# EAGLE board untitled (EAGLE 9.5.0)
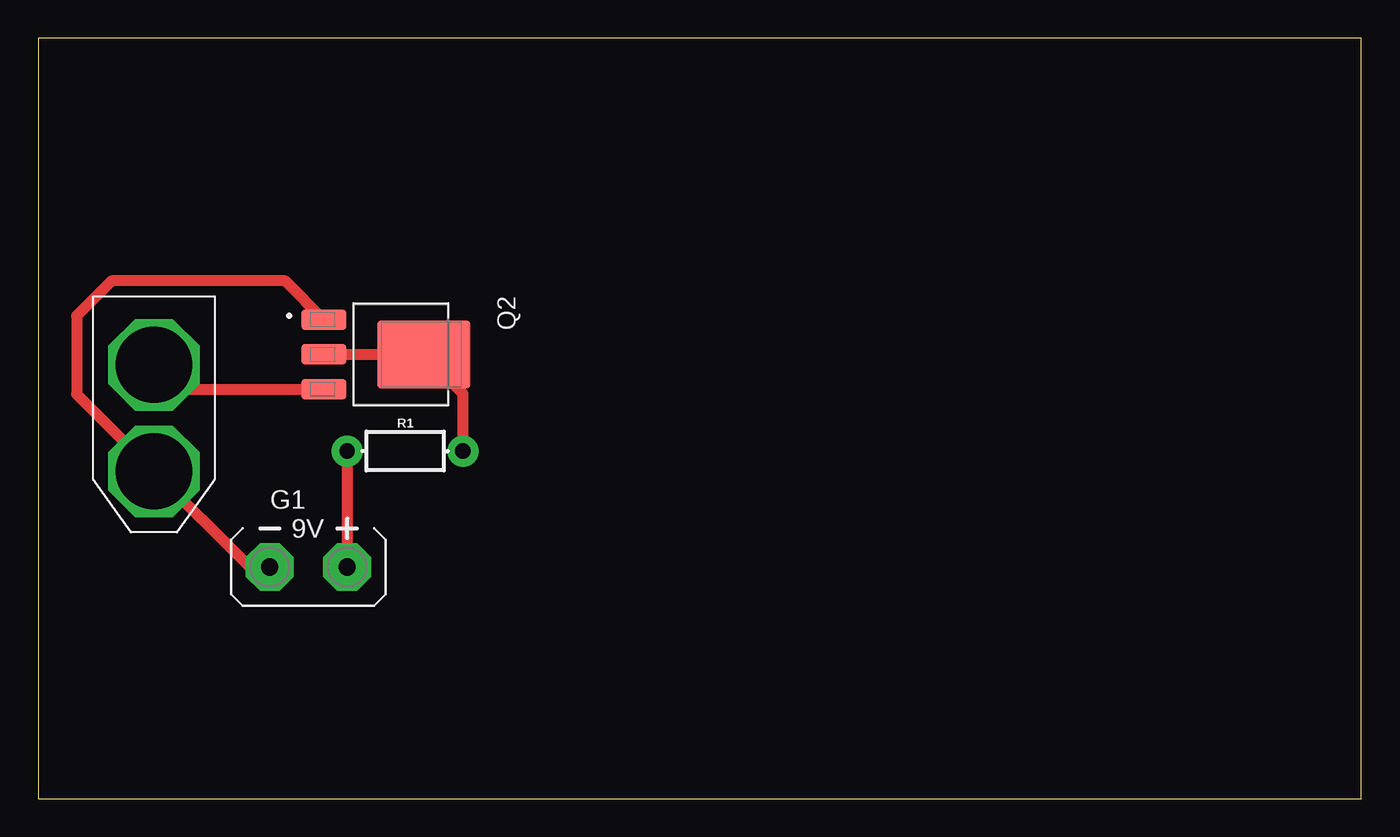
[diagram p0: board, top side]

Size 87 x 50 mm. Coordinates in mm from the lower left corner, seen from the top.
Outline: 0,0 87,0 87,50 0,50 0,0
Copper layers (1*16): Top 0.035mm / dielectric 1.5mm / Bottom 0.035mm
Design rules "default": minimum track width 6mil, minimum drill 0.35mm, track to track 6mil, track to pad 6mil, pad to pad 6mil, via to via 6mil, smd to smd 6mil, copper to edge 40mil, drill to drill 6mil, minimum pad ring 10mil, minimum via ring 8mil, stop-mask expansion 4mil, vias tented up to drill 0mil, thermal gap 10mil

## Footprints (pad centres in the part's own frame; a part is rotated, then mirrored left to right if it is on the bottom)
AB9V = drill 1.118 pad 3.15 octagon: + 0,2.54; - 0,-2.54
DPAK4 = smd 1.36 x 2.98: 1 -2.29,-4.07; 2 0,-4.07; 3 2.29,-4.07 | smd 4.49 x 6.1: 4 0,2.51
AXIAL-0.3-KIT = drill 1.016 pad 2.032: P$1 -3.81,0; P$2 3.81,0
XT60 = drill 5 octagon: + 4.5,0; - 11.5,0

## Placement (x,y rotation side)
G1  AB9V  [AB9V]  17.78,15.24 270 top
Q2  NTD3055L104G  [DPAK4]  22.86,29.21 270 top
R1  [AXIAL-0.3-KIT]  24.13,22.86 0 top
U$1  XT60  [XT60]  7.62,33.02 270 top

## Library data of the parts
G1 = battery
Q2 = Transistor; CREATED_BY: PCBLayout.com; MANUFACTURER: ON SEMICONDUCTORS; MPN: NTD3055L104G; PACKAGE: DPAK-4
R1 = SparkFun-Resistors
U$1 = XT60

## Nets
N$1: G1.- Q2.1 U$1.-
N$2: G1.+ R1.P$1
N$3: Q2.2 Q2.4 R1.P$2
N$4: Q2.3 U$1.+

## Tracks (layer width: path | path; a pad name or v marks a point on that pad's centre or on a via)
N$1
  Top 0.152: 7.58,21.55 U$1.-
  Top 0.716: Q2.1 16.25,34.04 4.83,34.04 2.54,31.75 2.54,26.6 7.58,21.55 | G1.- 13.9,15.24 U$1.-
N$2
  Top 0.716: R1.P$1 G1.+
N$3
  Top 0.716: Q2.2 Q2.4 27.94,26.64 R1.P$2
N$4
  Top 0.716: U$1.+ 9.22,26.92 Q2.3